# EAGLE board board2 (EAGLE 6.5.0)
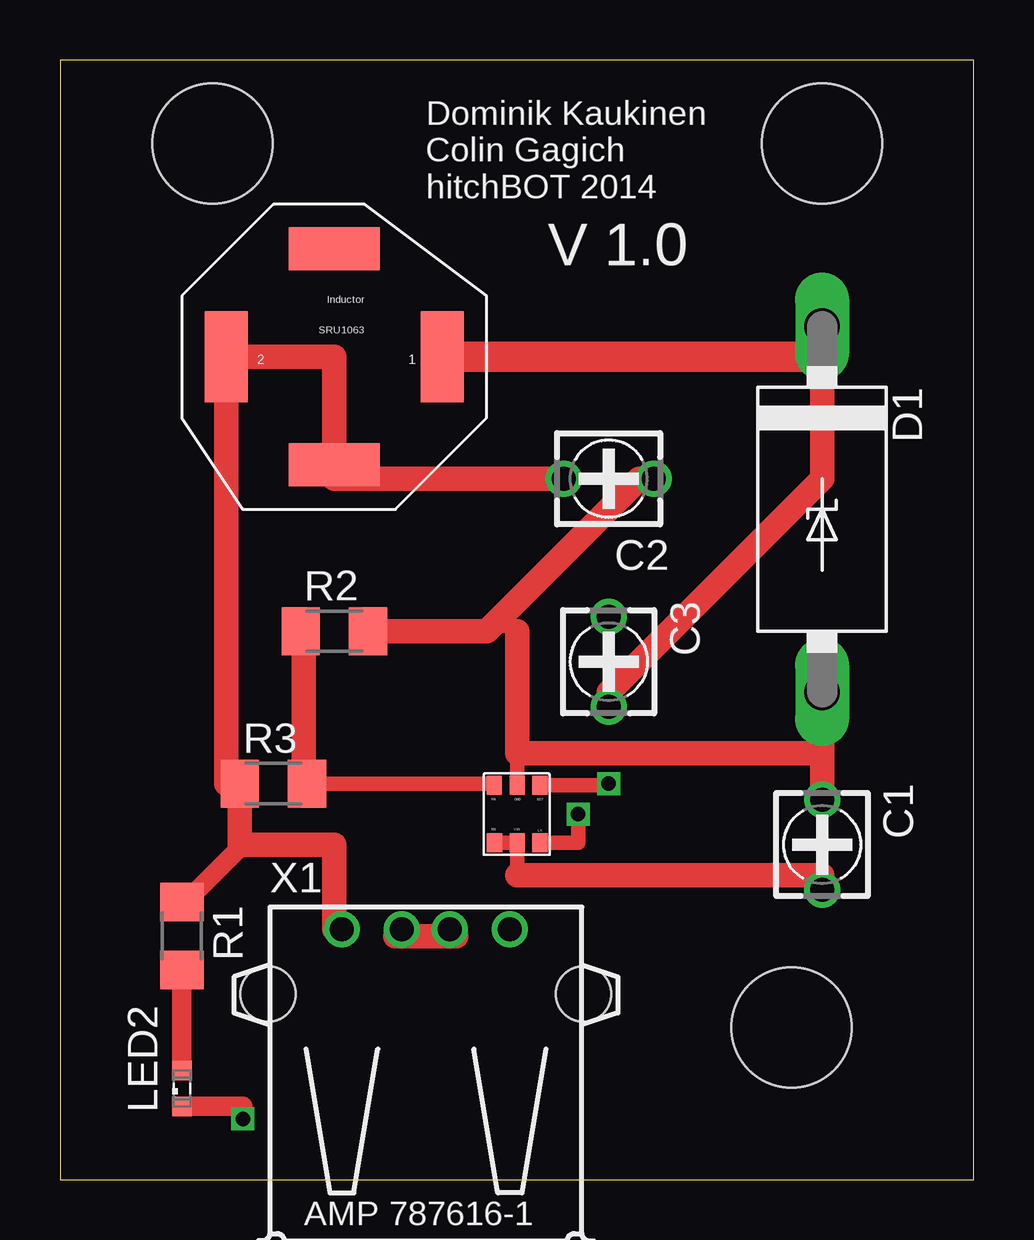
[diagram p0: board, top side]
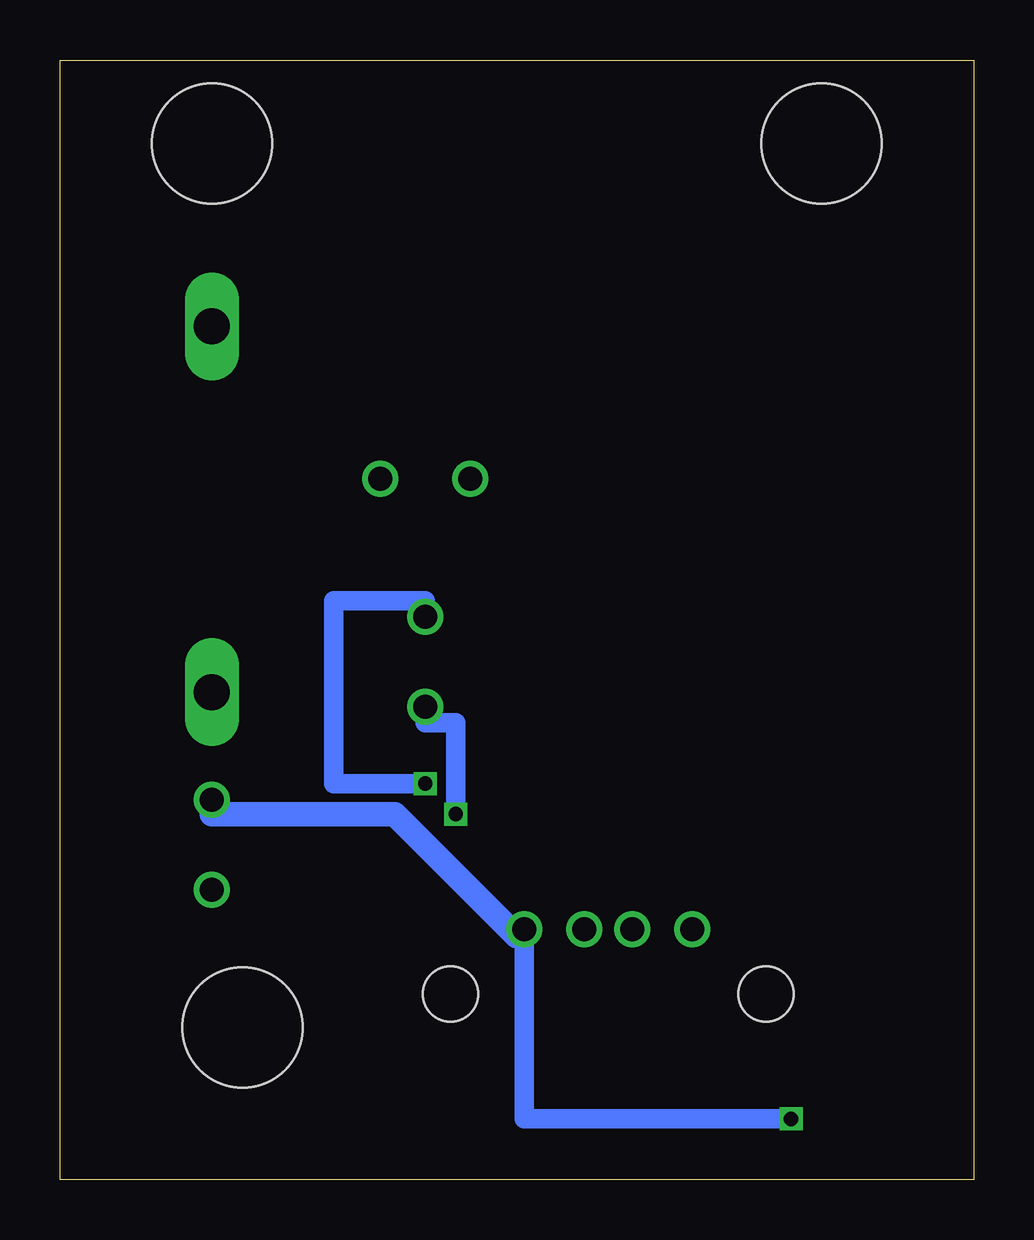
[diagram p1: board, bottom side, seen from below]

Size 38.08 x 46.66 mm. Coordinates in mm from the lower left corner, seen from the top.
Outline: 0,0 38.08,0 38.08,46.66 0,46.66 0,0
Copper layers (1*16): Top 0.0356mm / dielectric 1.5011mm / Bottom 0.0356mm
Design rules "LaenPCBOrder": minimum track width 6mil, minimum drill 13mil, track to track 6mil, track to pad 6mil, pad to pad 6mil, via to via 6mil, smd to smd 6mil, copper to edge 15mil, drill to drill 6mil, minimum pad ring 7mil, minimum via ring 7mil, stop-mask expansion 3mil, vias tented up to drill 0mil, thermal gap 10mil
Holes 5 mm at 6.35,43.18 31.75,43.18 30.48,6.35

## Footprints (pad centres in the part's own frame; a part is rotated, then mirrored left to right if it is on the bottom)
3008 = drill 1: + -1.875,0; - 1.875,0
C4111-15 = drill 1.499 long: A 7.62,0; C -7.62,0
SML0603 = smd 0.8 x 0.8: A 0.75,0; C -0.75,0
R1206 = smd 1.6 x 1.803: 1 -1.422,0; 2 1.422,0
M1206 = smd 1.6 x 2: 1 -1.4,0; 2 1.4,0
AO21282CI = smd 0.63 x 0.8: BST -0.95,-1.2; FB 0.95,-1.2; LX -0.95,1.2 | smd 0.635 x 0.8: EN 0.95,1.2; GND 0,-1.2; VIN 0,1.2
SRU1063 = smd 1.8 x 3.8: 1 -4.5,0; 2 4.5,0 | smd 3.8 x 1.8: P$3 0,4.5; P$4 0,-4.5
USB = drill 1: 1 -3.5,12.99; 2 -1,12.99; 3 1,12.99; 4 3.5,12.99 | hole 2.3: -6.57,10.28; 6.57,10.28

## Placement (x,y rotation side)
C1  4.7uF  [3008]  31.75,13.97 270 top
C2  10uF  [3008]  22.86,29.21 180 top
C3  0.1uF  [3008]  22.86,21.59 270 top
D1  1N5908  [C4111-15]  31.75,27.94 270 top
LED2  [SML0603]  5.08,3.81 90 top
R1  1k  [R1206]  5.08,10.16 270 top
R2  9.53k  [M1206]  11.43,22.86 0 top
R3  49.9k  [M1206]  8.89,16.51 0 top
U$1  AO21282CI  [AO21282CI]  19.05,15.24 180 top
U$2  SRU1063  [SRU1063]  11.43,34.29 180 top
X1  [USB]  15.24,-2.54 0 top

## Library data of the parts
C1-C3 = c-trimm; OC_FARNELL: unknown; OC_NEWARK: unknown
D1 = diode
LED2 = led
R1-R3 = rcl
U$1 U$2 = AO21282CI
X1 = con-amp

## Nets
DGND: C1.+ C2.+ D1.A LED2.C R2.2 U$1.GND X1.4
N$1: C1.- U$1.EN U$1.VIN
N$2: C3.+ U$1.BST
N$3: C3.- D1.C U$1.LX U$2.1
N$4: C2.- R1.1 R3.1 U$2.2 X1.1
N$5: R2.1 R3.2 U$1.FB
N$6: LED2.A R1.2
N$8: X1.2 X1.3

## Tracks (layer width: path | path; a pad name or v marks a point on that pad's centre or on a via)
DGND  (via drill 0.6)
  Top 0.152: 17.78,22.86 19.05,22.86 | 12.7,22.86 R2.2
  Top 0.61: 19.05,17.78 U$1.GND
  Top 0.813: LED2.C 7.62,3.06 v7.62,2.54
  Top 1.016: 19.05,22.86 19.05,17.78 31.75,17.78 | R2.2 17.78,22.86 24.13,29.21 C2.+ | C1.+ 31.75,17.78 | 31.75,17.78 D1.A
  Bottom 0.152: 19.05,10.16 X1.4 | 31.75,15.24 C1.+
  Bottom 0.813: v7.62,2.54 18.74,2.54 X1.4
  Bottom 1.016: 19.05,10.16 24.13,15.24 31.75,15.24
N$1
  Top 0.61: 19.05,12.7 U$1.VIN U$1.EN
  Top 1.016: 19.05,12.7 31.75,12.7 C1.-
N$2  (via drill 0.6)
  Top 0.61: U$1.BST 22.86,16.44 v22.86,16.51
  Bottom 0.813: v22.86,16.51 26.67,16.51 26.67,24.13 22.86,24.13 C3.+
N$3  (via drill 0.6)
  Top 0.152: 31.75,34.29 D1.C
  Top 0.61: U$1.LX 21.59,14.04 v21.59,15.24
  Top 1.016: 31.75,34.29 31.75,29.21 22.86,20.32 C3.-
  Top 1.27: 31.75,34.29 U$2.1
  Bottom 0.61: 22.86,19.05 C3.-
  Bottom 0.813: v21.59,15.24 21.59,19.05 22.86,19.05
N$4
  Top 0.152: 5.08,11.43 R1.1
  Top 0.813: 7.62,13.97 5.08,11.43
  Top 1.016: C2.- 11.43,29.21 11.43,34.29 U$2.2 6.93,16.51 R3.1 7.49,13.97 7.62,13.97 11.43,13.97 11.43,10.45 X1.1
N$5
  Top 0.152: 10.16,16.51 R3.2 | 10.16,22.86 R2.1
  Top 0.406: 18.1,16.51 U$1.FB
  Top 0.61: R3.2 18.1,16.51
  Top 1.016: 10.16,22.86 10.16,16.51
N$6
  Top 0.813: LED2.A R1.2
N$8
  Top 0.254: 13.97,10.16 X1.2 | 16.51,10.16 X1.3
  Top 1.016: 16.51,10.16 13.97,10.16

## Text on the board
tNames: Dominik Kaukinen / Colin Gagich / hitchBOT 2014 | V 1.0